# Altium PCB SensorBoard.PcbDoc
Units mil, origin at the board's own origin, x right, y up, seen from the top; angles counter-clockwise.
Board outline 1338.58 x 944.88 mil, 2 copper layers (Top1, Bottom2), stack 42.17 mil thick; 27 components, 20 nets, 135 pads, 98 vias.
Unrouted connection lines stored in the file: 37.
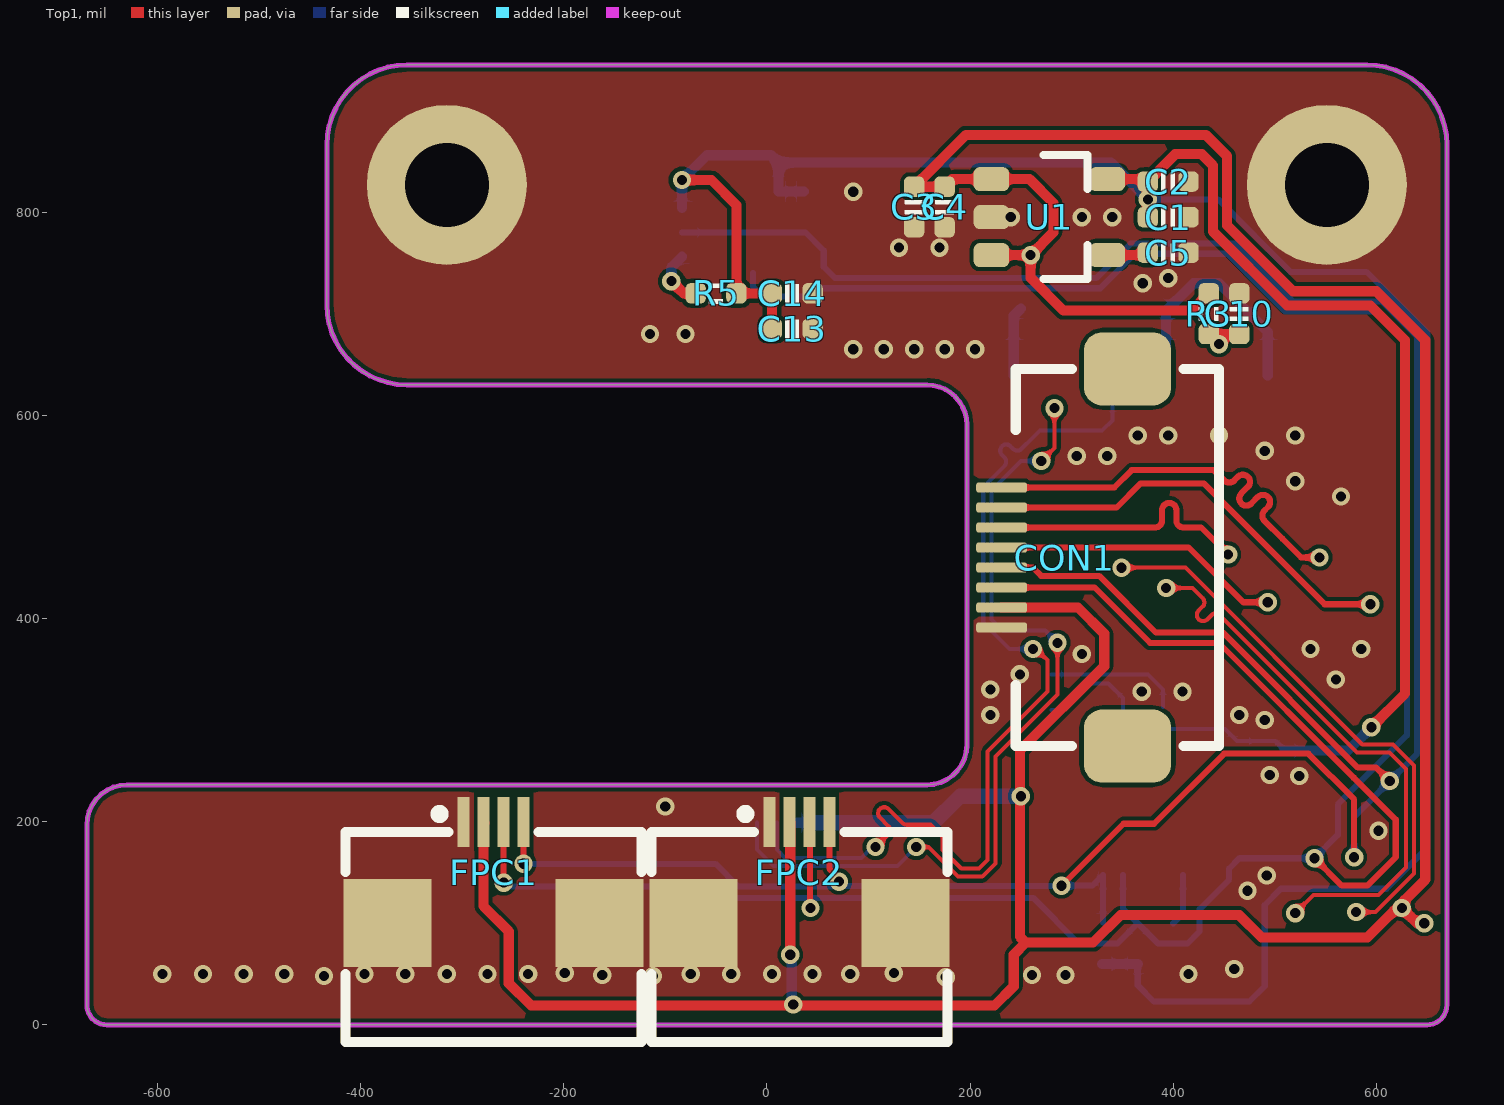
[diagram p0: Top1 view]
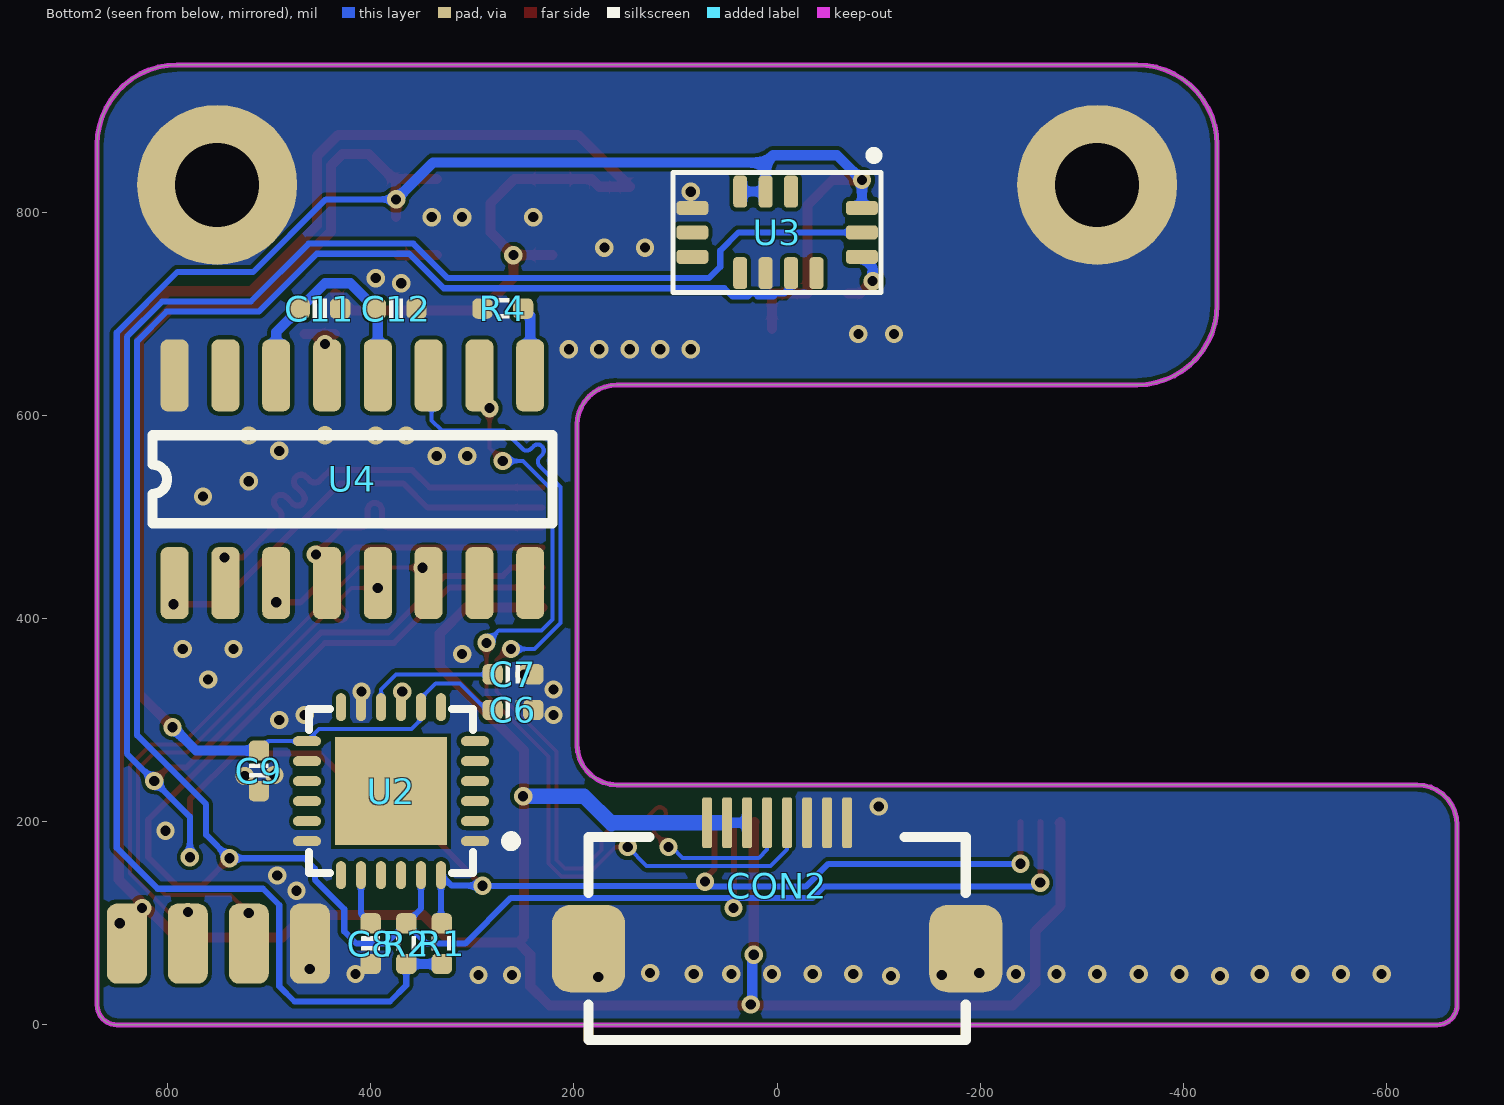
[diagram p1: Bottom2 view, seen from below]
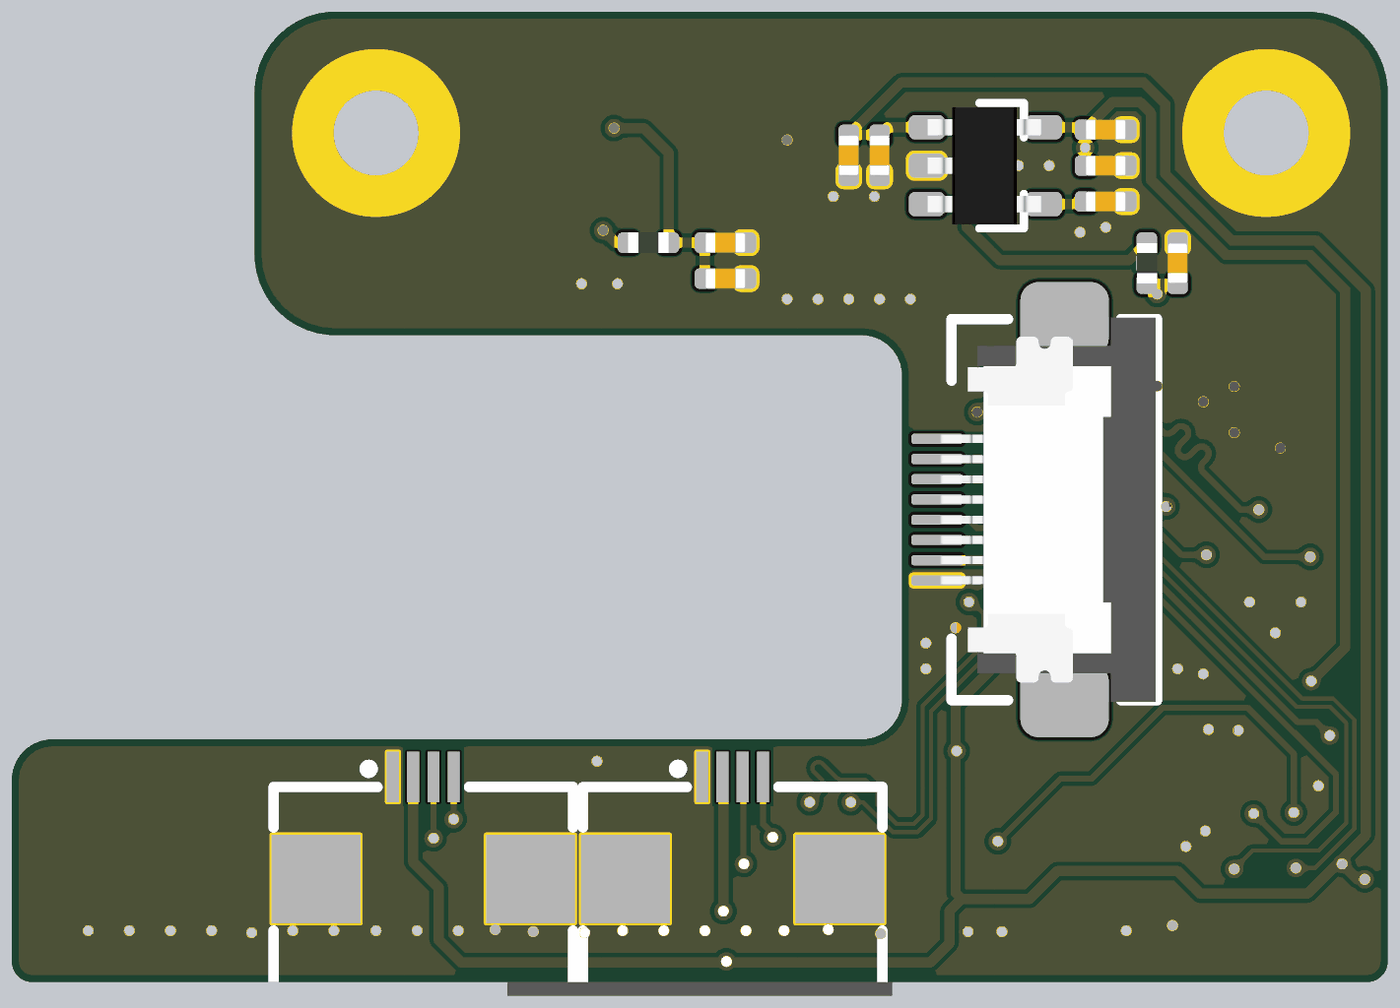
[diagram p2: 3D render of the assembled board from above, using the file's embedded part models]
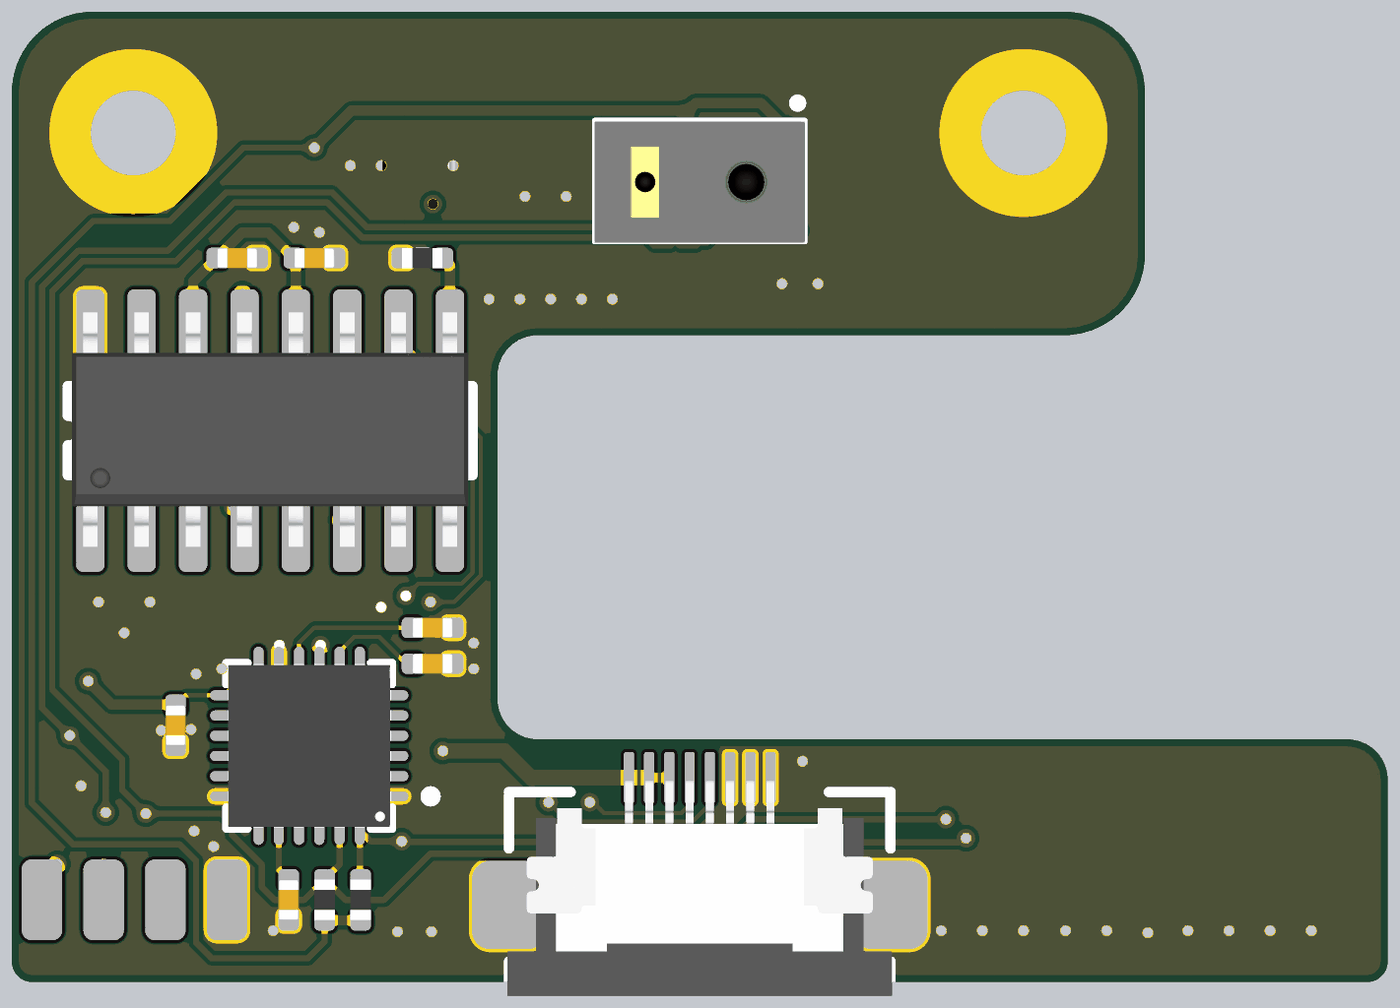
[diagram p3: 3D render of the assembled board from below, using the file's embedded part models]

## Layer stack, top to bottom
Top Solder: solder mask 0.4, Solder Resist, Dk 3.5
Top1: signal copper 1.4
Dielectric 1: prepreg 39.3701, PP-006, Dk 4.1
Bottom2: signal copper 1.4
Bottom Solder: solder mask 0.4, Solder Resist, Dk 3.5

## Board outline
-669.29,19.69 ccw(c-649.61,19.68) -649.61,0 649.61,0 ccw(c649.61,19.68) 669.29,19.69 669.29,866.14 ccw(c590.55,866.14) 590.55,944.88 -354.33,944.88 ccw(c-354.33,866.14) -433.07,866.14 -433.07,708.66 ccw(c-354.33,708.66) -354.33,629.92 157.48,629.92 cw(c157.48,590.55) 196.85,590.55 196.85,275.59 cw(c157.48,275.59) 157.48,236.22 -629.92,236.22 ccw(c-629.92,196.85) -669.29,196.85

## Design rules (kind name [scope] priority, off if disabled: settings)
Clearance Clearance_Logo [InNetClass('Logo')] p1: gap=8 ignorepadtopadclearanceinfootprint=FALSE
Clearance [All] p2: gap=4 ignorepadtopadclearanceinfootprint=FALSE except(0: Arc-Hole Track-Hole SMDPad-Hole THPad-Hole Via-Hole Fill-Hole Poly-Hole Region-Hole Text-Hole)
ComponentClearance [All] p1: gap=0 collisioncheckmode=3 verticalgap=0 showdistances=FALSE
DiffPairsRouting [All] p1: maxlimit=9 minlimit=9 mostfreqgap=9 toplayer_minwidth=15 toplayer_maxwidth=15 toplayer_prefwidth=15 bottomlayer_minwidth=15 bottomlayer_maxwidth=15 bottomlayer_prefwidth=15 maxuncoupledlength=500
FanoutControl Fanout_BGA [All] p1: bgadir=Out bgaviamode=Centered fanoutstyle=Auto fanoutdirection=Alternating viagrid=1 // Fanout_BGA (Default Rule)
HoleSize [All] p1: absolutevalues=TRUE maxlimit=10000 minlimit=8 maxpercent=80.000 minpercent=20.000
MinimumSolderMaskSliver [All] p1 off: minsoldermaskwidth=2
PlaneClearance [All] p1: clearance=8
PlaneConnect [All] p1: planeconnectstyle=Direct reliefexpansion=20 reliefentries=4 reliefconductorwidth=10 reliefairgap=10
PolygonConnect [All] p1: connectstyle=Direct reliefconductorwidth=10 reliefentries=4 polygonreliefangle="90 Angle" airgapwidth=10
RoutingVias [All] p1: holewidth=8 width=16 viastyle="Through Hole" minholewidth=6 minwidth=12 maxholewidth=28 maxwidth=50
SilkToSilkClearance [All] p1: silktosilkclearance=0
SilkToSolderMaskClearance [IsPad] p1: minsilkscreentomaskgap=0 clearancetoexposedcopper=TRUE
SolderMaskExpansion [All] p1: expansion=3 istentingtop=FALSE
Width Logo [InNetClass('Logo')] p1: maxlimit=100 minlimit=0.1 preferedwidth=10
Width GND [(InNet('AGND') OR InNet('GND'))] p2: maxlimit=50 minlimit=4 preferedwidth=10
Width VCC [(InNet('VDD_SYS_3.3V') OR InNet('VDD_AV_3.3V') OR InNet('VDD_5V') OR InNet('VDD1V2-SYS') OR InNet('VDD1V1-EPHY') OR InNet('VDD-CPUX') OR InNet('VDD-CPUS') OR InNet('VDD-CPUFB') OR InNet('VCC-DRAM'))] p3: maxlimit=50 minlimit=4 preferedwidth=10
Width [All] p4: maxlimit=10000 minlimit=4 preferedwidth=4
21 further rules are at their usual default settings.

## Components (designator, comment, footprint, x,y, rotation, side; value= is the part's Value field where it differs from the comment)
C1 "0.1uF" CAP_0402 395,795 r180 top value=0.1u
C2 "10uF" CAP_0402 395,830 r180 top value=0.1u
C3 "10uF" CAP_0402 145,805 r90 top value=0.1u
C4 "0.1uF" CAP_0402 175,805 r90 top value=0.1u
C5 "10nF" CAP_0402 395,760 r180 top value=0.1u
C6 "10nF" CAP_0402 260,310 r180 bottom value=0.1u
C7 "0.1uF" CAP_0402 260,345 r180 bottom value=0.1u
C8 "2.2nF" CAP_0402 400,80 r90 bottom value=0.1u
C9 "0.1uF" CAP_0402 510,250 r90 bottom value=0.1u
C10 "10uF" CAP_0402 465,700 r270 top value=0.1u
C11 "10uF" CAP_0402 450,705 r180 bottom value=0.1u
C12 "0.1uF" CAP_0402 375,705 r180 bottom value=0.1u
C13 "10uF" CAP_0402 25,685 r0 top value=0.1u
C14 "0.1uF" CAP_0402 25,720 r0 top value=0.1u
CON1 "FFC_0.5_8" FFC_0.5_8 320,460 r90 top
CON2 "FFC_0.5_8" FFC_0.5_8 0,110 r180 bottom locked
FPC1 "0.5K-DX-4PWB" FPC-SMD_4P-P0.50_DEALON_0.5K-DX-4PWB -269,150 r0 top
FPC2 "0.5K-DX-4PWB" FPC-SMD_4P-P0.50_DEALON_0.5K-DX-4PWB 32,150 r0 top
R1 "10K" RES_0402 330,80 r270 bottom value=22R
R2 "10K" RES_0402 365,80 r270 bottom value=22R
R3 "4.7R" RES_0402 435,700 r270 top value=22R
R4 "100K" RES_0402 270,705 r180 bottom value=22R
R5 "10K" RES_0402 -50,720 r180 top value=22R
U1 "LP2992 3V3" SOT23-5 280,795 r0 top
U2 "MPU6050" QFN-24 380,230 r0 bottom
U3 "PAJ7620U2" PAJ7620U2 0,780 r270 bottom locked
U4 "HS8836A" SO-16N 423,542 r90 bottom

## Footprints (in the part's own frame and the unit in brackets; to place one, negate y for a bottom-side part, rotate by r counter-clockwise, add the part's x,y. Pads: shape width x height; smd on the part's side, far side on the other; paste and mask are expansions set on the pad)
CAP_0402 [mil]
  rrect50% 20x20 smd: 1(-20,0) 2(20,0)
  silkscreen extent -7,-9 7,9, body extent -20,-10 20,10, height 20
FFC_0.5_8 [mil]
  rrect50% 72x86 smd: 0(-185.63,-35) 0(185.63,-35)
  rrect50% 10x50 smd: 1(-68.9,89) 2(-49.21,89) 3(-29.53,89) 4(-9.84,89) 5(9.84,89) 6(29.53,89) 7(49.21,89) 8(68.9,89)
  silkscreen extent -186,-125 186,75, body extent -187,-124 187,87, height 82
FPC-SMD_4P-P0.50_DEALON_0.5K-DX-4PWB [mm]
  rect 0.3x1.25 smd mask+0.05: 1(-0.75,1.263) 2(-0.25,1.263) 3(0.25,1.263) 4(0.75,1.263)
  rect 2.2x2.2 smd mask+0.05: 5(2.65,-1.263) 6(-2.65,-1.263)
  silkscreen extent -3.7,-4.24 3.7,1.56
PAJ7620U2 [mm]
  rrect50% 0.35x0.8 smd: 1(-0.61,2.12) 2(0,2.12) 3(0.61,2.12) 8(0.61,-2.12) 9(0,-2.12) 10(-0.61,-2.12)
  rrect50% 0.8x0.35 smd: 4(1.02,0.983) 5(1.02,0.348) 6(1.02,-0.287) 7(1.02,-0.922) 11(-1.02,-0.922) 12(-1.02,-0.287) 13(-1.02,0.348)
  silkscreen extent -1.95,-2.6 1.5,2.6, body extent -1.48,-2.6 1.52,2.6, height 1.9
QFN-24 [mm] "QFN, 24-Leads, Body 4.1x4.1mm (max), Pitch 0.50mm, IPC Low Density"
  oval 0.7x0.25 smd: 1(-2.1,1.25) 2(-2.1,0.75) 3(-2.1,0.25) 4(-2.1,-0.25) 5(-2.1,-0.75) 6(-2.1,-1.25) 13(2.1,-1.25) 14(2.1,-0.75) 15(2.1,-0.25) 16(2.1,0.25) 17(2.1,0.75) 18(2.1,1.25)
  oval 0.25x0.7 smd: 7(-1.25,-2.1) 8(-0.75,-2.1) 9(-0.25,-2.1) 10(0.25,-2.1) 11(0.75,-2.1) 12(1.25,-2.1) 19(1.25,2.1) 20(0.75,2.1) 21(0.25,2.1) 22(-0.25,2.1) 23(-0.75,2.1) 24(-1.25,2.1)
  rect 2.8x2.7 smd: ""(0,0)
  silkscreen extent -3.12,-2.05 2.05,2.05, body extent -2.02,-2.02 2.02,2.02, height 0.95
RES_0402 [mil]
  rrect50% 20x20 smd: 1(-20,0) 2(20,0)
  silkscreen extent -7,-10 7,10, body extent -20,-10 20,10, height 14
SO-16N [mm]
  rrect50% 1.8x0.7 smd: 1(-2.723,4.318) 2(-2.723,3.048) 3(-2.723,1.778) 4(-2.723,0.508) 5(-2.723,-0.762) 6(-2.723,-2.032) 7(-2.723,-3.302) 8(-2.723,-4.572) 9(2.469,-4.572) 10(2.469,-3.302) 11(2.469,-2.032) 12(2.469,-0.762) 13(2.469,0.508) 14(2.469,1.778) 15(2.469,3.048) 16(2.469,4.318)
  silkscreen extent -1.23,-5.13 0.97,4.87, body extent -3,-5.03 2.8,4.77, height 1.75
SOT23-5 [mm] "SOT23, 3-Leads, Body 3.1x3.0mm (max), Pitch 0.95mm, IPC Medium Density"
  rrect50% 0.889x0.6 smd: 1(-1.5,0.95) 2(-1.5,0) 3(-1.5,-0.95) 4(1.396,-0.95) 5(1.396,0.95)
  silkscreen extent -0.2,-1.55 0.9,1.55, body extent -1.48,-1.45 1.32,1.45, height 1.2

## Part data
C1 C2 C3 C4 C5 C6 C7 C8 C9 C10 C11 C12 C13 C14: library part 电容-0402, "Capacitor"
CON1 CON2: "FFC"
FPC1 FPC2: JLCPCB Part Class="Extended Part", LCSC Part Name="0.5mm P数:4 翻盖式 下接", Manufacturer=HDGC(华德共创), Operating Temperature Range=-20℃~+85℃, Add into BOM=yes, Contact Type=下接, Convert to PCB=yes, Datasheet=https://atta.szlcsc.com/upload/public/pdf/source/20211029/5210AEC837E1AC9B697C39805C1E664F.pdf, Device=0.5K-DX-4PWB, FFC, FCB Thickness=0.3mm, Height Above Board=2mm, Locking Feature=翻盖式, Manufacturer Part=0.5K-DX-4PWB, Mounting Type=卧贴, Name=0.5K-DX-4PWB, Number of Contacts=4, Pitch=0.5mm, Supplier=LCSC, Supplier Footprint=SMD,P=0.5mm, Supplier Part=C2911830, Symbol=0.5K-DX-4PWB
R1 R2 R3 R4 R5: library part 电阻-0402, "Resistor"
U1: library part LP2992, "LDO"
U2: "六轴传感器"
U3: "module sensorPAJ7620U2 : 54/TRAY, 5400/BOX, 32400/CARTON", Package=None, Availability="Not in stock", Check_prices=https://www.snapeda.com/parts/PAJ7620U2/PixArt/view-part/?ref=eda, MF=Pixart, MP=PAJ7620U2, Price=None, SnapEDA_Link=https://www.snapeda.com/parts/PAJ7620U2/PixArt/view-part/?ref=snap
U4: "USB2.0 HUB"

## Free pads (board coordinates)
  round 157.48 hole 82.68: ""(-314.96,826.77) ""(551.18,826.77)
  rrect50% 39.37x78.74 smd far side: ""(460,80) ""(520,80) ""(580,80) ""(640,80)

## Via types
v1: diameter 18, hole 10, Top1 to Bottom2, tented both sides, 98 vias

## Nets (pads, with @x,y where several pads share a name; then routed paths per layer and width w, separated by ;. In a path a pad name is that pad's centre, name@x,y a point inside that pad or via, vN(x,y) a via of type N, cw(c..) or ccw(c..) an arc to the next point about the centre after c; other vN are vias at no path point)
GND: C1.1 C2.1 C3.1 C4.1 C5.1 C6.2 C7.2 C8.1 C9.1 C10.1 C11.2 C12.2 C13.2 C14.2 CON1.1 CON2.0 CON2.6 CON2.7 CON2.8 FPC1.1 FPC1.5 FPC1.6 FPC2.1 FPC2.5 FPC2.6 pad.@460,80 pad.@551.18,826.77 pad.@-314.96,826.77 R4.1 U1.2 U2.1 U2.9 U2.11 U2.18 U3.6 U3.10 U4.16
  other v1: 176,47 -436,48 -112,48 -162,49 261,49 294,49 -595,50 -555,50 -515,50 -475,50 -396,50 -356,50 -315,50 -275,50 -235,50 -75,50 -35,50 5,50 45,50 82,50 415,50 -199,51 125,51 460,55 473,132 492,147 602,191 -100,215 524,245 495,246 490,300 220,305 465,305 369,328 409,328 220,330 560,340 249,345 310,365 535,370 585,370 565,520 520,535 305,560 335,560 490,565 365,580 395,580 445,580.31 520,580 85,665 115,665 145,665 175,665 205,665 -115,680 -80,680 370,730 395,735 130,765 170,765 240,795 310,795 340,795 85,820
I2C_SCL_1: CON1.3 FPC1.3 FPC2.3 R2.1 U2.23 U3.5 | length 2988
  Top1 w6: FPC1.3 -259.08,199.63 -259.08,140.08 v1(-259,140) ; FPC2.3 42.42,199.13 42.42,115.58 v1(43,115) ; CON1.3 322.53,430.47 377.14,375.86 445,375.86 577.59,243.27 577.75,243.27 619,202.03 619,165.04 590.96,137 566,137 v1(539,164) v1@538.66,164.34
  Bottom2 w6: v1(-259,140) -255.75,140 -251.75,136 -46,136 -35,125 42,125 ; U3.5 -13.7,726.7 -7,720 0.62,720 3.53,717.09 19.07,717.09 21.98,720 25.62,720 28.53,717.09 44.07,717.09 51.98,725 328.14,725 362.14,759 453.07,759 510.07,702 601,702 630,673 630,285 562,217 562,187 v1(539,164) 465.08,164 455,153.92 455,143 426,114 426,92 414,80 385,80 R2.1 ; v1(43,115) 42,116 42,125 ; U2.23 350.47,114.53 R2.1 ; 42,125 262,125 307,80 345,80 R2.1
I2C_SDA_1: CON1.4 FPC1.4 FPC2.4 R1.1 U2.24 U3.2 | length 2967.3
  Top1 w6: v1(-239.47,158.51) FPC1.4 ; FPC2.4 61.53,153.72 71,144.25 v1(71,141) ; CON1.4 261.84,450.16 270,442 327,442 383,386 449,386 581.73,253.27 599.73,253.27 v1(613,240) ; v1(290,137) 351,198 381.03,198 450.03,267 533,267 578.03,221.97 v1(578,165)
  Bottom2 w6: v1(-239.47,158.51) -50.51,158.51 -28,136 71,136 v1@71.5,136.5 ; U3.2 38,780 56,762 56,746.09 67.09,735 324,735 358,769 461,769 518,712 605.14,712 640,677.14 640,267 v1(613,240) 578,205 v1(578,165) ; v1(71,141) 71,137 v1@71.5,136.5 ; R1.1@330.79,100.79 U2.24 320.46,137 v1(290,137) 289.5,136.5 v1@71.5,136.5
NetC5_2: C5.2 U1.4 | length 37.7
  Top1 w10: U1.4 C5.2@372.6,757.6
NetC7_1: C7.1 U2.10 | length 133.5
  Bottom2 w4: C7.1 375,345 389.84,330.16 U2.10
NetC8_2: C8.2 U2.20 | length 51.3
  Bottom2 w6: C8.2 409.53,109.53 U2.20
NetC10_2: C10.2 R3.2 U4.13 | length 44.1
  Top1 w10: R3.2 C10.2@455,680 ; v1(445,670) C10.2@455,680 ; C10.2 C10.2@455,680
NetC11_1: C11.1 C12.1 U4.12 U4.14 | length 234.8
  Bottom2 w10: U4.12 C12.1@393,703 ; C12.1 420,730 445,730 C11.1 493,682 U4.14
NetR4_2: R4.2 U4.9 | length 68.7
  Bottom2 w10: U4.9 243,698 R4.2
NetR5_2: R5.2 U3.3 | length 57.3
  Top1 w10: v1(-94,732) -82,720 R5.2
  Bottom2 w10: v1(-94,732) -94,745.45 U3.3
USB_DM_CAM_1: pad.@520,80 U4.5 | length 559.1
  Top1 w4: v1(393,430) 419,430 428.9,420.1 cw(c424.66,415.86) 428.9,411.62 425.01,407.73 ccw(c429.26,403.49) 425.01,399.24 ccw(c429.26,403.49) 433.5,399.24 437.39,403.13 cw(c441.63,398.89) 445.87,403.13 452,397 581,268 613,268 629,252 629,155 602,128 538,128 v1(520,110)
USB_DM_CP_1: CON1.5 U4.3 | length 284.3
  Top1 w6: CON1.5 415.16,469.84 469,416 v1(493,416)
USB_DM_HUB_1: CON2.5 U4.10 | length 855.1
  Top1 w4: v1(147,175) 159,175 188,146 212,146 225,159 225,264 286,325 v1(286,376) ; v1(270,555) 283,568 v1(283,607)
  Bottom2 w4: CON2.5 -9.84,172.84 6.62,156.38 128.38,156.38 v1(147,175) ; v1(270,555) 250,555 221,526 221,399 232,388 274,388 v1(286,376)
USB_DM_ST_1: CON1.7 U4.1 | length 422.1
  Top1 w6: CON1.7 344.21,509.21 368,533 430,533 549,414 v1(594,414)
USB_DP_CAM_1: pad.@580,80 U4.6 | length 547.7
  Top1 w4: v1(349,450) 412,450 586,276 616.31,276 637,255.31 637,149 599,111 v1(580,111)
USB_DP_CP_1: CON1.6 U4.4 | length 270.3
  Top1 w6: CON1.6 379,489.53 382,489.53 ccw(c382,496.53) 389,496.53 389,506.7 cw(c396,506.7) 403,506.7 403,496.53 ccw(c410,496.53) 410,489.53 422.76,489.53 427.47,489.53 v1(454,463)
USB_DP_HUB_1: CON2.4 U4.11 | length 973.8
  Top1 w4: v1(107,175) 118,186 119.41,187.41 ccw(c115.17,191.66) 119.41,195.9 111.27,204.05 cw(c115.51,208.29) 111.27,212.53 cw(c115.51,208.29) 119.75,212.53 133.53,198.76 ccw(c137.77,203) 137.77,197 157,197 161,197 173,185 173,172.31 191.31,154 208.69,154 217,162.31 217,269 276,328 276,359 265,370 v1(262,370)
  Bottom2 w4: CON2.4 9.84,172.59 18.06,164.38 92.91,164.38 103.53,175 v1(107,175) ; v1(262,370) 238.69,370 213,395.69 213,529.31 232.34,548.66 233.76,550.07 ccw(c229.51,554.31) 233.76,558.56 231.38,560.93 cw(c235.63,565.17) 231.38,569.42 cw(c235.63,565.17) 239.87,569.42 242.24,567.04 ccw(c246.49,571.28) 250.73,567.04 261.34,577.66 268.69,585 330,585 340,595 340,636.2 U4.11
USB_DP_ST_1: CON1.8 U4.2 | length 416
  Top1 w6: CON1.8 341.9,528.9 359,546 440,546 448,538 450.12,535.88 ccw(c455.07,540.83) 460.02,535.88 463.56,539.41 cw(c468.51,534.46) 473.46,539.41 cw(c468.51,534.46) 473.46,529.51 466.99,523.05 ccw(c471.94,518.1) 466.99,513.15 ccw(c471.94,518.1) 476.89,513.15 483.36,519.61 cw(c488.31,514.66) 493.26,519.61 cw(c488.31,514.66) 493.26,509.72 489.72,506.18 ccw(c494.67,501.23) 489.72,496.28 507.5,478.5 526,460 v1(544,460)
VBUS_IN: C3.2 C4.2 CON1.2 CON2.1 CON2.2 CON2.3 FPC1.2 FPC2.2 pad.@640,80 R3.1 U1.1 U1.3 | length 3709.5
  Top1 w10: FPC1.2@-277.94,198.8 FPC1.2 -278.84,116.84 -254,92 -254,41 -232,19 224,19 243,38 243,69.14 254.86,81 ; FPC2.2 23,198.86 v1(23,69) ; U1.3 v1(259.6,757.6) ; CON1.2 306.21,410.79 332,385 332,353 249,270 v1@249,225 ; v1(250,225) 249,224 249,86.86 254.86,81 ; R3.1 418,703 292,703 259.6,735.4 v1(259.6,757.6) ; v1(625,115) 640,100 v1(647,100) ; 254.86,81 321,81 348,108 465,108 487,86 591,86 648,143 648,673.8 599.8,722 517.8,722 453,786.8 453,855 432,876 196,876 C3.2 C4.2 182.4,832.4 U1.1 258.6,832.4 282,809 282,780 v1(259.6,757.6)
  Bottom2 w10: v1(23,69) 24.5,67.5 24.5,21.5 v1(26,20) ; CON2.3 CON2.2
  Bottom2 w15: CON2.2 CON2.1 162,199 163,198 190,225 v1(250,225)
VCC_3V3: C1.2 C2.2 C6.1 C9.2 C13.1 C14.1 R1.2 R2.2 R5.1 U1.5 U2.8 U2.13 U3.1 U3.11 U3.12 | length 3305.6
  Top1 w10: v1(-83.46,831.54) -54.54,831.54 -30,807 R5.1 C14.1 C13.1 ; U1.5 372.6,832.4 C2.2 ; C1.2 v1(375,812.5) C2.2 ; v1(595,293) 628,326 628,674 594,708 512,708 439,781 439,846 428,857 402,857 C2.2
  Bottom2 w4: C6.1 286,310 312,336 336,336 350.47,321.53 U2.8 350.47,300.53 360,291 450.89,291 U2.13 500.79,279.21 C9.2
  Bottom2 w6: R2.2 365,39 381,23 475,23 490,38 490,118 506,134 609.77,134 650,174.23 650,681.28 590.25,741.03 515.67,741.03 444.2,812.5 v1(375,812.5)
  Bottom2 w10: U3.1 v1(-83.46,831.54) -59,856 4,856 11.3,848.7 ; U3.11 U3.12 11.3,848.7 ; R1.2 R2.2 ; v1(375,812.5) 338.8,848.7 11.3,848.7 ; C9.2 572,270 v1(595,293)
pads on no net: CON1.0 U2. U2.2 U2.3 U2.4 U2.5 U2.6 U2.7 U2.12 U2.14 U2.15 U2.16 U2.17 U2.19 U2.21 U2.22 U3.4 U3.7 U3.8 U3.9 U3.13 U4.7 U4.8 U4.15

## Polygon pours and split planes (outlines as drawn)
GND on Bottom2 "GND_L02_P001" (solid, remove dead copper, pour order 1): -700,950 700,950 700,0 -700,0
GND on Top1 "GND_L01_P000" (solid, remove dead copper, pour order 0): -700,950 700,950 700,0 -700,0

## Keep-outs
Keep-Out Layer:
  the board outline again, w5

## Silkscreen, mask and mechanical layers (free items; w line width, h text height)
Mechanical 1:
  the board outline again, w10